# Altium PCB Main.PcbDoc
Units mm, origin at the board's own origin, x right, y up, seen from the top; angles counter-clockwise.
Board outline 54.5 x 67 mm, 4 copper layers (Top Layer, Ground Layer, Power Layer, Bottom Layer), stack 1.591 mm thick; 35 components, 40 nets, 143 pads, 40 vias.
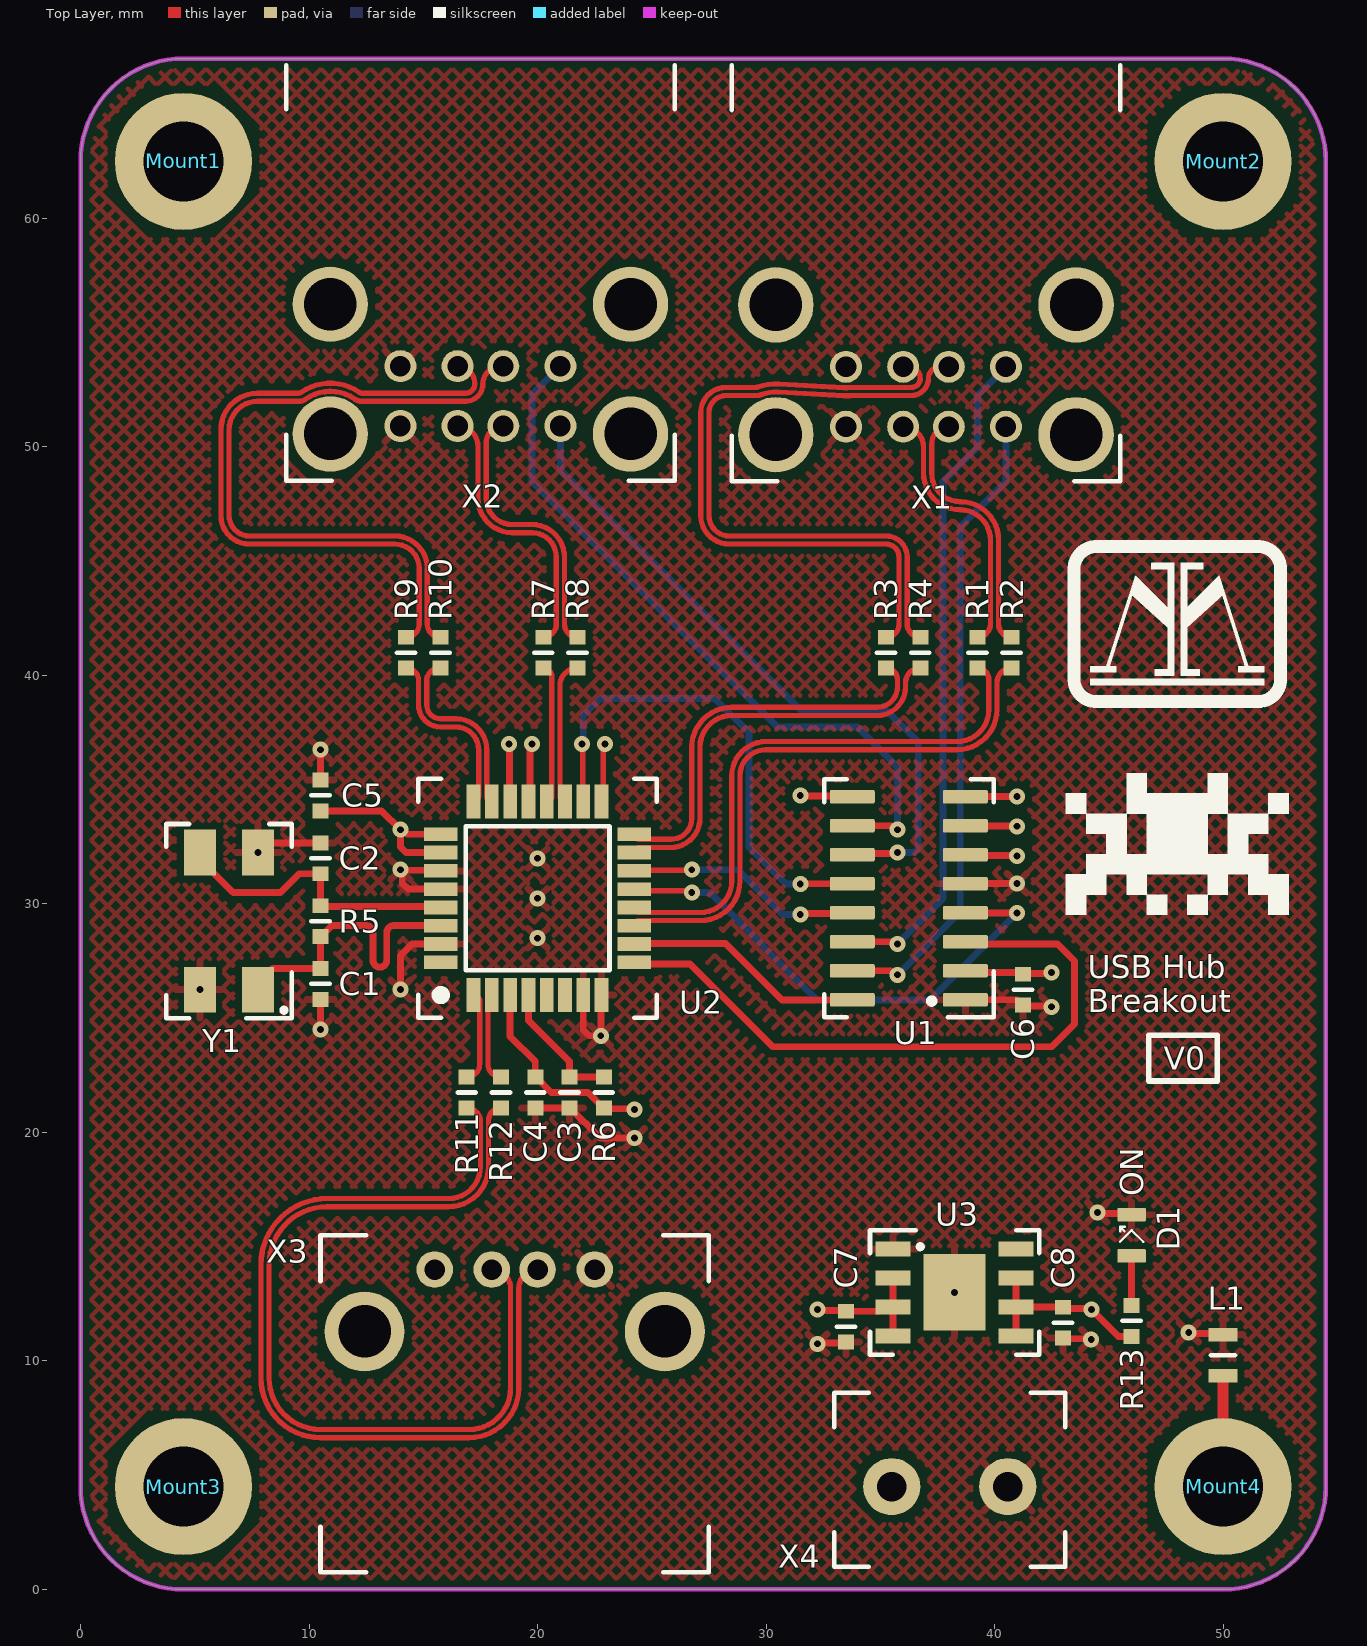
[diagram p0: Top Layer view]
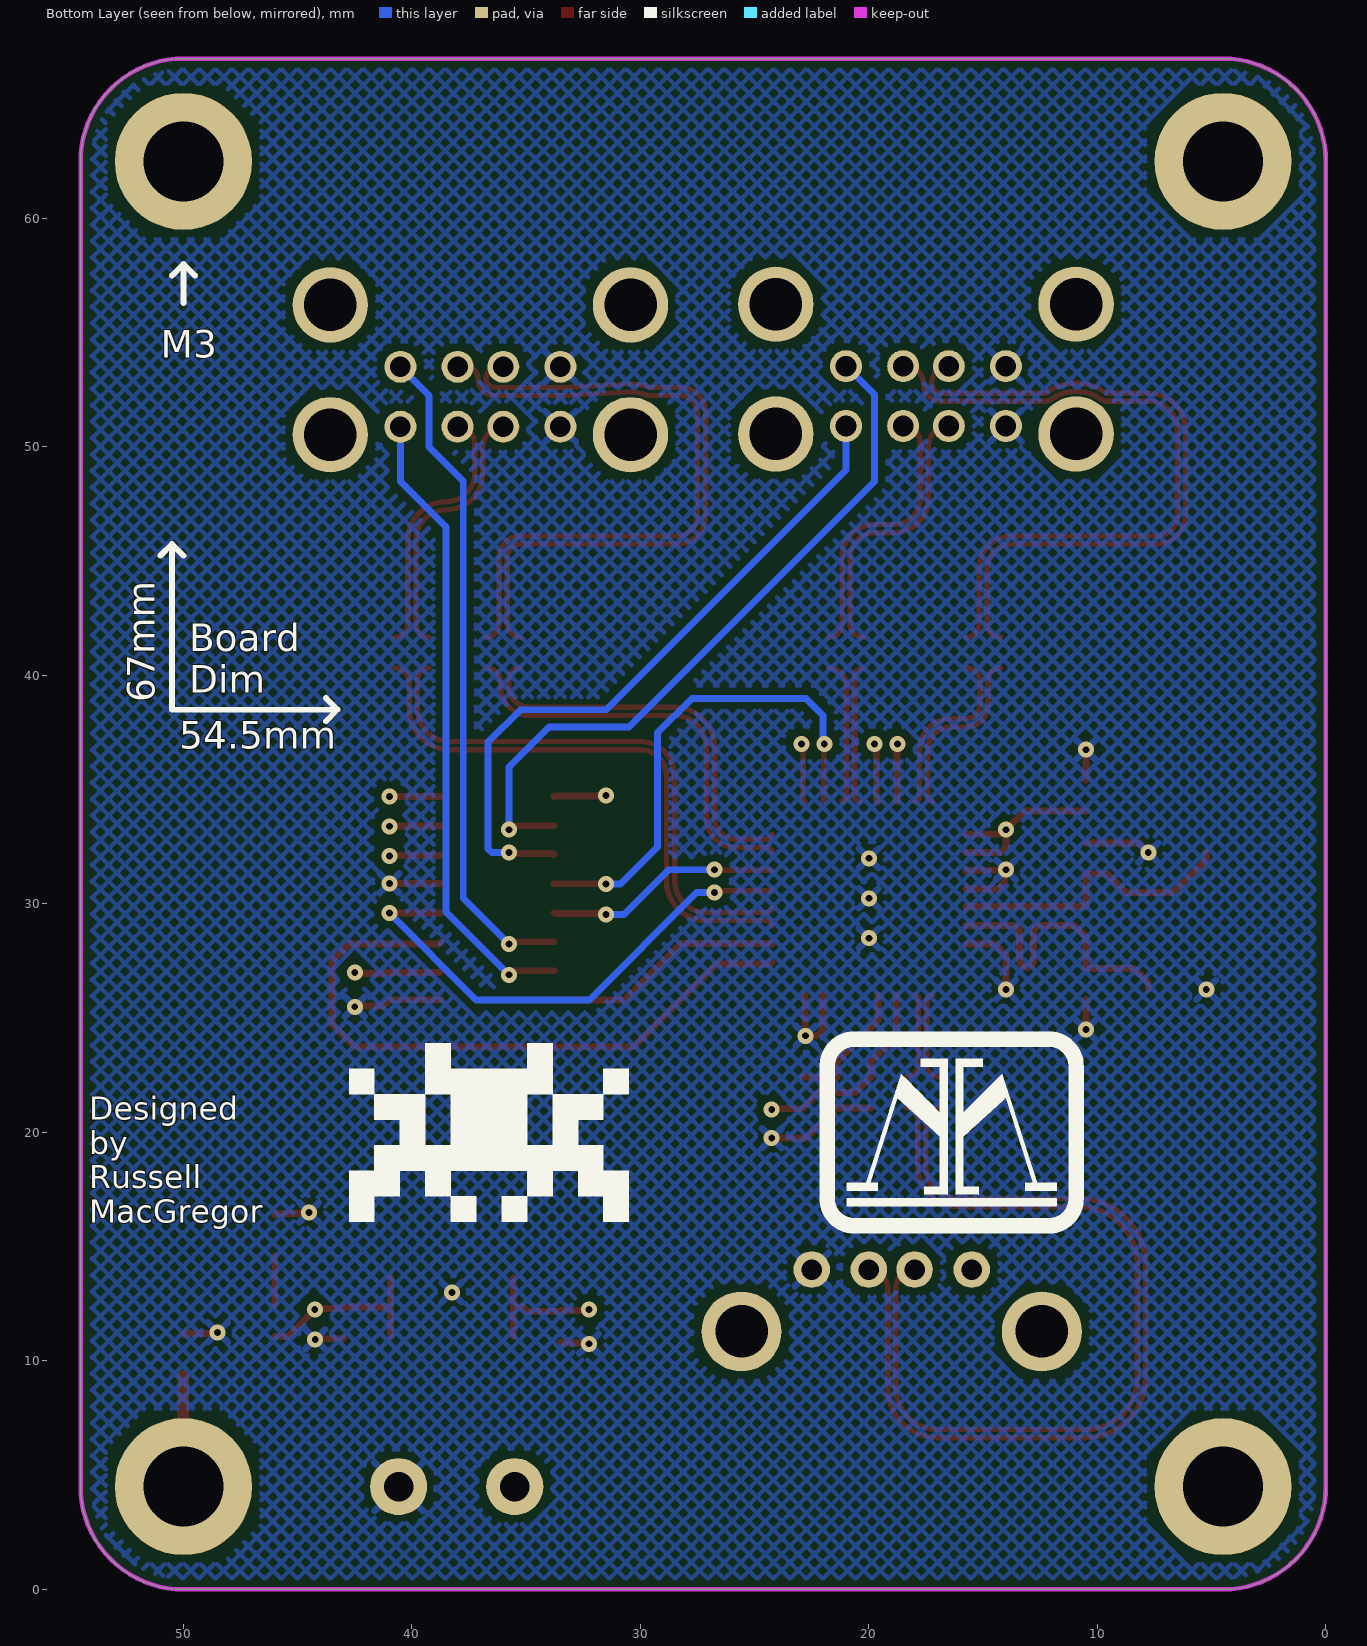
[diagram p1: Bottom Layer view, seen from below]
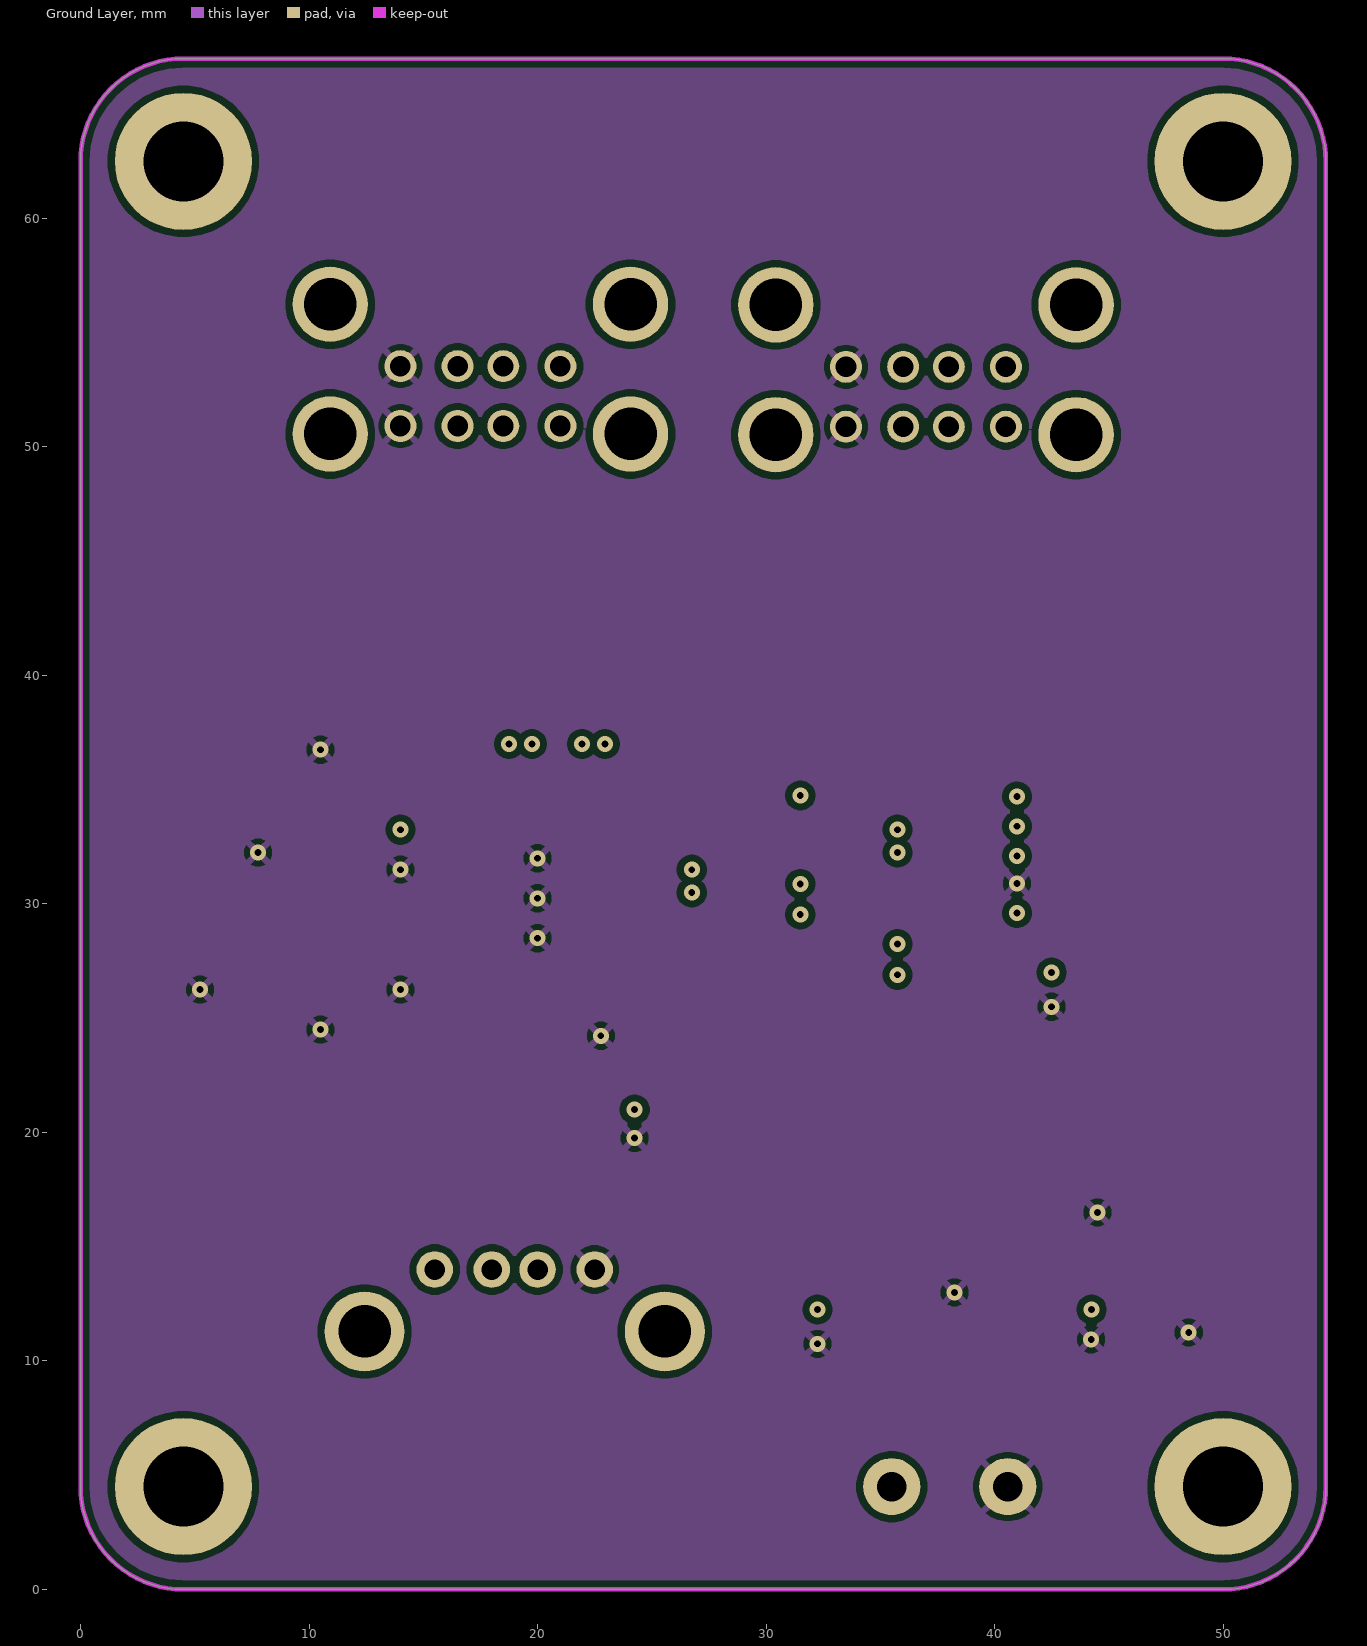
[diagram p2: Ground Layer]
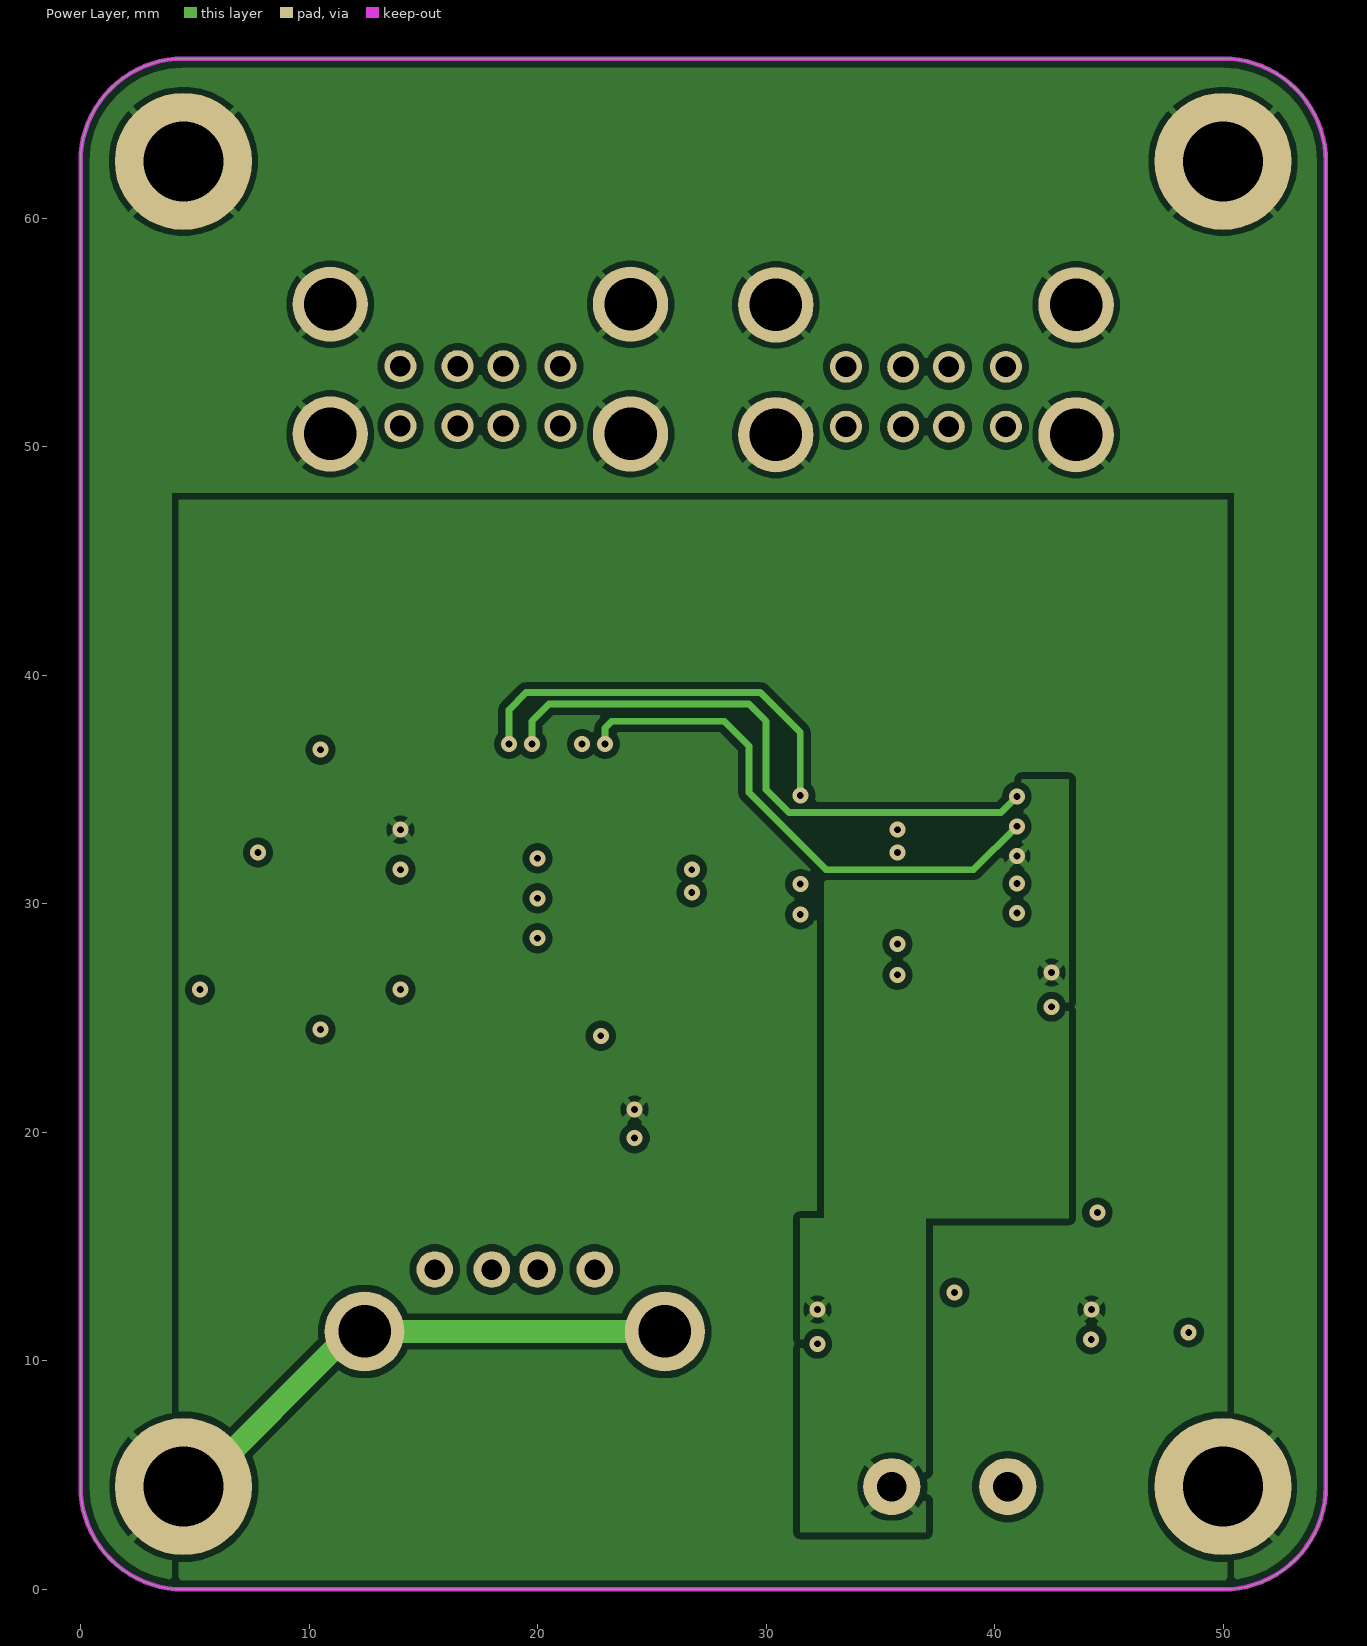
[diagram p3: Power Layer]
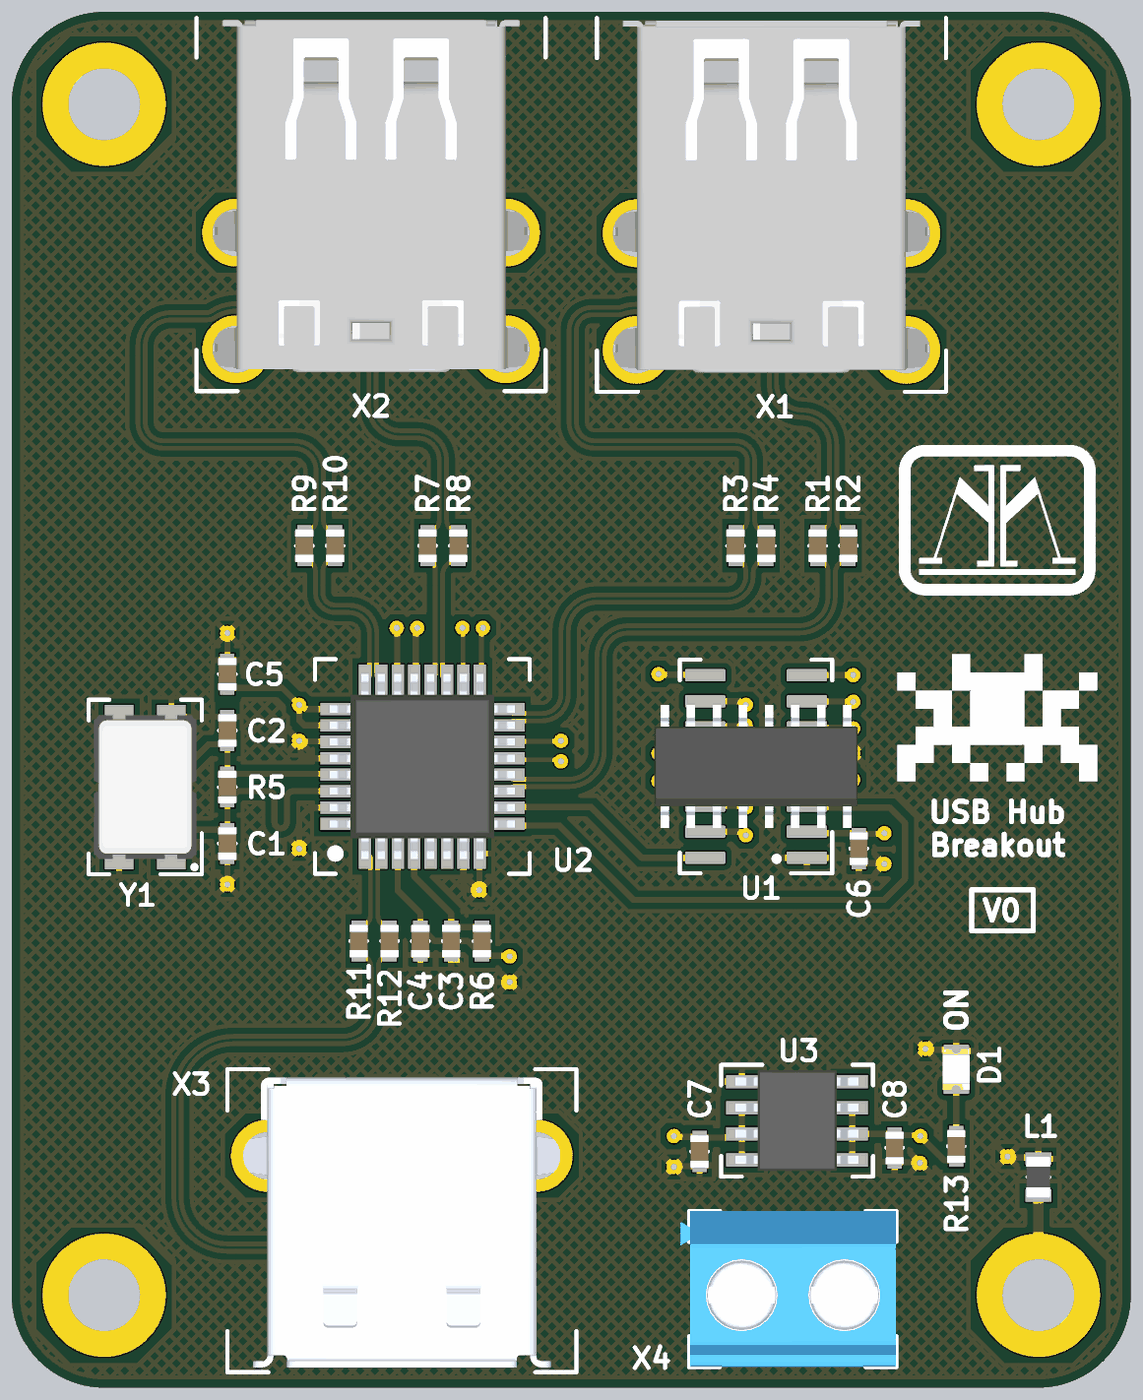
[diagram p4: 3D render of the assembled board from above, using the file's embedded part models]

## Layer stack, top to bottom
Top Solder: solder mask 0.0102, Solder Resist, Dk 3.8
Top Layer: signal copper 0.035
Dielectric 2: prepreg 0.2104, 7628*1, Dk 4.4
Ground Layer: signal copper 0.0175
Dielectric 1: dielectric 1.065, FR-4, Dk 4.8
Power Layer: signal copper 0.0175
Dielectric 3: prepreg 0.2104, 7628*1, Dk 4.4
Bottom Layer: signal copper 0.035
Bottom Solder: solder mask 0.0102, Solder Resist, Dk 3.8

## Board outline
4.5,0 cw(c4.5,4.5) 0,4.5 0,62.5 cw(c4.5,62.5) 4.5,67 50,67 cw(c50,62.5) 54.5,62.5 54.5,4.5 cw(c50,4.5) 50,0

## Design rules (kind name [scope] priority, off if disabled: settings)
BoardOutlineClearance [All] p1: gap=0.2 ignorepadtopadclearanceinfootprint=FALSE
Clearance "inPolygon Clearance" [InPolygon] p1: gap=0.3 ignorepadtopadclearanceinfootprint=TRUE // this rule ensures that every net within a polygon of a different net has a set clearance from the poly
Clearance "Different Diff Pair" [All] p2: gap=0.2 ignorepadtopadclearanceinfootprint=TRUE
Clearance "Same Diff Pair" [All] p3: gap=0.1 ignorepadtopadclearanceinfootprint=TRUE
Clearance "Different Nets" [not InAnyDifferentialPair] p4: gap=0.3 ignorepadtopadclearanceinfootprint=TRUE except(0.1: Arc-SMDPad Arc-THPad Arc-Via Arc-Text Track-SMDPad Track-THPad Track-Via Track-Text SMDPad-Text THPad-Text Via-Text Fill-Text Poly-Text Region-Text Text-Text; 0.12: Arc-Arc Arc-Track Track-Track; 0.15: SMDPad-SMDPad SMDPad-THPad SMDPad-Via THPad-THPad THPad-Via Via-Via; 0.2: Arc-Hole Track-Hole SMDPad-Hole THPad-Hole Via-Hole Fill-Hole Poly-Hole Region-Hole Text-Hole)
Clearance "Same Net" [not InAnyDifferentialPair] p5: gap=0 ignorepadtopadclearanceinfootprint=TRUE except(0.1: THPad-Via; 0.18: Arc-Arc Arc-Track Track-Track)
ComponentClearance [All] p1: gap=0.102 collisioncheckmode=3 verticalgap=0.102 showdistances=TRUE
DiffPairsRouting "Ethernet Routing" [InDifferentialPairClass('Ethernet_Pairs')] p1: maxlimit=0.25 minlimit=0.2 mostfreqgap=0.25 toplayer_maxgap=0.2 toplayer_prefgap=0.2 toplayer_minwidth=0.25 toplayer_maxwidth=0.25 toplayer_prefwidth=0.25 midlayer1_mingap=0.25 midlayer1_minwidth=0.19 midlayer1_maxwidth=0.19 midlayer1_prefwidth=0.19 midlayer2_mingap=0.25 midlayer2_minwidth=0.19 midlayer2_maxwidth=0.19 midlayer2_prefwidth=0.19 bottomlayer_maxgap=0.2 bottomlayer_prefgap=0.2 bottomlayer_minwidth=0.25 bottomlayer_maxwidth=0.25 bottomlayer_prefwidth=0.25 impedanceprofiledriven=TRUE maxuncoupledlength=12.7
DiffPairsRouting "USB Routing" [InDifferentialPairClass('USB_Pairs')] p2: maxlimit=0.291 minlimit=0.127 mostfreqgap=0.291 toplayer_maxgap=0.127 toplayer_prefgap=0.127 toplayer_minwidth=0.23 toplayer_maxwidth=0.23 toplayer_prefwidth=0.23 midlayer1_mingap=0.291 midlayer1_minwidth=0.25 midlayer1_maxwidth=0.25 midlayer1_prefwidth=0.25 midlayer2_mingap=0.291 midlayer2_minwidth=0.25 midlayer2_maxwidth=0.25 midlayer2_prefwidth=0.25 bottomlayer_maxgap=0.127 bottomlayer_prefgap=0.127 bottomlayer_minwidth=0.23 bottomlayer_maxwidth=0.23 bottomlayer_prefwidth=0.23 impedanceprofiledriven=TRUE impedanceprofileid={22B42C18-8A70-498F-AC70-E7D5BCB9B566} impedanceprofilevalue=90.000000 maxuncoupledlength=12.7
DiffPairsRouting "CAN Routing" [InDifferentialPairClass('CAN_Pairs')] p3: maxlimit=0.907 minlimit=0.5 mostfreqgap=0.907 toplayer_maxgap=0.5 toplayer_prefgap=0.5 toplayer_minwidth=0.201 toplayer_maxwidth=0.201 toplayer_prefwidth=0.201 midlayer1_mingap=0.907 midlayer1_minwidth=0.155 midlayer1_maxwidth=0.155 midlayer1_prefwidth=0.155 midlayer2_mingap=0.907 midlayer2_minwidth=0.155 midlayer2_maxwidth=0.155 midlayer2_prefwidth=0.155 bottomlayer_maxgap=0.5 bottomlayer_prefgap=0.5 bottomlayer_minwidth=0.201 bottomlayer_maxwidth=0.201 bottomlayer_prefwidth=0.201 maxuncoupledlength=12.7
Height [All] p1: minheight=0 maxheight=1816.048 prefheight=12.7
HoleSize [All] p1: absolutevalues=TRUE maxlimit=6.3 minlimit=0.3 maxpercent=80.000 minpercent=20.000
HoleToHoleClearance [All] p1: gap=0.25 allowstackedmicrovias=FALSE
Length [All] p1: maxlimit=43.432 minlimit=0 usedelayunits=TRUE mindelay=0.000000 maxdelay=10000.000000
MatchedLengths "Diff Pair Matched Delays" [InDifferentialPairClass('Ethernet_Pairs') or InDifferentialPairClass('USB_Pairs') or InDifferentialPairClass('CAN_Pairs')] p1: tolerance=5 checknetsindiffpair=TRUE checkdiffpairvsdiffpair=FALSE checkxsignals=FALSE checkothers=FALSE usedelayunits=TRUE delaytolerance=100.000000
MinimumAnnularRing [All] p1: minimumring=0.2
MinimumSolderMaskSliver [All] p1: minsoldermaskwidth=0
PlaneClearance "Supply Net Clearance" [InNetClass('Supply_Nets')] p1: clearance=0.5
PlaneClearance "All Nets" [All] p2: clearance=0.3
PolygonConnect "Supply Nets" [InNetClass('Supply_Nets')] p1: connectstyle=Relief reliefconductorwidth=0.3 reliefentries=4 polygonreliefangle="90 Angle" conductorbypadedge=TRUE mindistance=0.381 enablemindistance=FALSE airgapwidth=0.254
PolygonConnect General [All] p2: connectstyle=Relief reliefconductorwidth=0.254 reliefentries=4 polygonreliefangle="90 Angle" airgapwidth=0.254
RoutingVias [All] p1: holewidth=0.2 width=0.35 viastyle="Through Hole" minholewidth=0.15 minwidth=0.3 maxholewidth=6.3 maxwidth=6.55
SilkToSilkClearance [All] p1: silktosilkclearance=0
SilkToSolderMaskClearance [All] p1: minsilkscreentomaskgap=0 clearancetoexposedcopper=TRUE
SolderMaskExpansion [All] p1: expansion=0.075 istentingtop=FALSE
SupplyNets "Schematic Supply Nets_3" [InNet('GND')] p1: voltage=0.000
SupplyNets "Schematic Supply Nets_2" [InNet('+5V')] p2: voltage=0.000
SupplyNets "Schematic Supply Nets_7" [InNet('+3V3')] p3: voltage=0.000
SupplyNets "Schematic Supply Nets_1" [InNet('Earth')] p4: voltage=0.000
UnRoutedNet [All] p1: checkbadconnections=TRUE
Width "nRF Width" [InNetClass('nRF Signal')] p1: maxlimit=0.379 minlimit=0.263 preferedwidth=0.379 toplayer_minwidth=0.379 midlayer1_maxwidth=0.263 midlayer1_prefwidth=0.263 midlayer2_maxwidth=0.263 midlayer2_prefwidth=0.263 bottomlayer_minwidth=0.379 impedanceprofiledriven=TRUE minimp=50.000000 maximp=50.000000 favimp=50.000000 checkconnectedcopper=TRUE
Width [All] p2: maxlimit=100 minlimit=0.1 preferedwidth=0.3
20 further rules are at their usual default settings.

## Classes and differential pairs
differential pair class USB_Pairs: USB0_D USB0_DX USB1_D USB1_DX USB2_D USB2_DX USB3_D USB3_DX USB4_D USB4_DX
net class Supply_Nets: +3V3 +5V Earth GND
component class "USB Hub": C1 C2 C3 C4 C5 C6 R1 R2 R3 R4 R5 R6 R7 R8 R9 R10 R11 R12 U1 U2 X1 X2 X3 Y1
component class Regulator: C7 C8 D1 L1 Mount1 Mount2 Mount3 Mount4 R13 U3 X4
differential pair USB4_DX: +USB4_DX_P -USB4_DX_N
differential pair USB4_D: +USB4_D_P -USB4_D_N
differential pair USB3_DX: +USB3_DX_P -USB3_DX_N
differential pair USB3_D: +USB3_D_P -USB3_D_N
differential pair USB2_DX: +USB2_DX_P -USB2_DX_N
differential pair USB2_D: +USB2_D_P -USB2_D_N
differential pair USB1_DX: +USB1_DX_P -USB1_DX_N
differential pair USB1_D: +USB1_D_P -USB1_D_N
differential pair USB0_DX: +USB0_DX_P -USB0_DX_N
differential pair USB0_D: +USB0_D_P -USB0_D_N

## Components (designator, comment, footprint, x,y, rotation, side; value= is the part's Value field where it differs from the comment)
C1 "[Cap] 0603 24pF 1% 100V" "[Cap] SMD 0603" 10.5,26.5 r270 top
C2 "[Cap] 0603 24pF 1% 100V" "[Cap] SMD 0603" 10.5,32 r90 top
C3 "[Cap] 0603 0.1uF 10% 16V" "[Cap] SMD 0603" 21.4,21.75 r90 top
C4 "[Cap] 0603 0.1uF 10% 16V" "[Cap] SMD 0603" 19.9,21.75 r90 top
C5 "[Cap] 0603 0.1uF 10% 16V" "[Cap] SMD 0603" 10.5,34.75 r270 top
C6 "[Cap] 0603 0.1uF 10% 16V" "[Cap] SMD 0603" 41.25,26.25 r90 top
C7 "[Cap] 0603 10uF 10% 10V" "[Cap] SMD 0603" 33.5,11.5 r90 top
C8 "[Cap] 0603 10uF 10% 10V" "[Cap] SMD 0603" 43,11.675 r90 top
D1 "[LED] SMD 0805 Green" "[LED] SMD 0805" 46,15.5 r90 top
L1 "652-MH2029-300Y" "[Ferrite] SMD 0805" 50,10.25 r90 top
Mount1 "M3 Mount Hole" "[Mount] M3 Mount Hole" 4.5,62.5 r0 top
Mount2 "M3 Mount Hole" "[Mount] M3 Mount Hole" 50,62.5 r0 top
Mount3 "M3 Mount Hole" "[Mount] M3 Mount Hole" 4.5,4.5 r0 top
Mount4 "M3 Mount Hole" "[Mount] M3 Mount Hole" 50,4.5 r0 top
R1 "[27] SMD 0603 1% 1/10W" "[Res] SMD 0603" 39.25,41 r270 top
R2 "[27] SMD 0603 1% 1/10W" "[Res] SMD 0603" 40.75,41 r270 top
R3 "[27] SMD 0603 1% 1/10W" "[Res] SMD 0603" 35.25,41 r270 top
R4 "[27] SMD 0603 1% 1/10W" "[Res] SMD 0603" 36.75,41 r270 top
R5 "[1M] SMD 0603 1% 1/10W" "[Res] SMD 0603" 10.5,29.25 r270 top
R6 "[47k] SMD 0603 1% 1/10W" "[Res] SMD 0603" 22.9,21.75 r90 top
R7 "[27] SMD 0603 1% 1/10W" "[Res] SMD 0603" 20.25,41 r270 top
R8 "[27] SMD 0603 1% 1/10W" "[Res] SMD 0603" 21.75,41 r270 top
R9 "[27] SMD 0603 1% 1/10W" "[Res] SMD 0603" 14.25,41 r270 top
R10 "[27] SMD 0603 1% 1/10W" "[Res] SMD 0603" 15.75,41 r270 top
R11 "[27] SMD 0603 1% 1/10W" "[Res] SMD 0603" 16.9,21.75 r90 top
R12 "[27] SMD 0603 1% 1/10W" "[Res] SMD 0603" 18.4,21.75 r90 top
R13 "[220] SMD 0603 1% 1/10W" "[Res] SMD 0603" 46,11.75 r90 top
U1 "[USB Power] 500mA 4port" "[IC] USB Hub Power Distribution" 36.25,30.25 r180 top
U2 "4port" "[USB Hub] USB2.0 4port" 20,30.25 r90 top
U3 "3V3 1.5A" "[Linear] 3V3 1.5A" 38.25,13 r0 top
X1 "USB-A" "[USB] Type-A Dual" 37,66.5 r180 top
X2 "USB-A" "[USB] Type-A Dual" 17.5,66.53 r180 top
X3 "USB-A" "[USB] Type-A" 19,14 r0 top
X4 "2pin Screw Terminal" "[Screw Terminal] 2pin 5mm" 38,4.5 r0 top
Y1 "[Crystal] SMD 6MHz" "[Crystal] SMD 6MHz" 6.5,29.25 r270 top

## Footprints (in the part's own frame and the unit in brackets; to place one, negate y for a bottom-side part, rotate by r counter-clockwise, add the part's x,y. Pads: shape width x height; smd on the part's side, far side on the other; paste and mask are expansions set on the pad)
"[Cap] SMD 0603" [mm]
  rect 0.65x0.7 smd: 1(-0.675,0) 2(0.675,0)
  silkscreen extent 0,-0.4 0,0.4, body extent -0.8,-0.45 0.8,0.45, height 0.8
"[Crystal] SMD 6MHz" [mm] "ECS-060-18-20BM-JEN-TR"
  rect 2x1.4 smd: 1(3,1.27) 2(-3,1.27) 3(-3,-1.27) 4(3,-1.27)
  silkscreen extent -4.25,-2.75 4.25,2.75, body extent -3.5,-2.5 3.5,2.5, height 1.3
"[Ferrite] SMD 0805" [mm]
  rect 0.6x1.25 smd: 1(-0.9,0) 2(0.9,0)
  silkscreen extent 0,-0.53 0,0.53, body extent -1,-0.6 1,0.6, height 1.1
"[IC] USB Hub Power Distribution" [mm]
  rrect25% 1.97x0.6 smd: 1(-2.475,4.445) 2(-2.475,3.175) 3(-2.475,1.905) 4(-2.475,0.635) 5(-2.475,-0.635) 6(-2.475,-1.905) 7(-2.475,-3.175) 8(-2.475,-4.445) 9(2.475,-4.445) 10(2.475,-3.175) 11(2.475,-1.905) 12(2.475,-0.635) 13(2.475,0.635) 14(2.475,1.905) 15(2.475,3.175) 16(2.475,4.445)
  silkscreen extent -3.71,-5.2 3.71,5.2, body extent -3,-4.95 3,4.95, height 1.75
"[LED] SMD 0805" [mm]
  rrect20% 0.6x1.25 smd: 1(-0.9,0) 2(0.9,0)
  silkscreen extent -0.28,-0.51 0.37,0.51, body extent -1,-0.65 1,0.65, height 0.8
"[Linear] 3V3 1.5A" [mm]
  rect 1.525x0.65 smd: 1(-2.688,1.905) 2(-2.688,0.635) 3(-2.688,-0.635) 4(-2.688,-1.905) 5(2.688,-1.905) 6(2.688,-0.635) 7(2.688,0.635) 8(2.688,1.905)
  rect 2.71x3.35 smd: 9(0,0)
  silkscreen extent -3.7,-2.73 3.7,2.73, body extent -3,-2.45 3,2.45, height 1.5
"[Mount] M3 Mount Hole" [mm] "Place at least 4.5mm from board edge. Plated."
  round 6 hole 3.5: 1(0,0)
"[Res] SMD 0603" [mm]
  rect 0.65x0.7 smd: 1(-0.675,0) 2(0.675,0)
  silkscreen extent 0,-0.4 0,0.4, body extent -0.8,-0.45 0.8,0.45, height 0.8
"[Screw Terminal] 2pin 5mm" [mm]
  round 2.5 hole 1.3: 1(-2.5,0) 2(2.58,0)
  silkscreen extent -5.01,-3.5 5.09,4.1, body extent -5.45,-3.5 5.05,4.1, height 9.99
"[USB Hub] USB2.0 4port" [mm]
  rect 1.475x0.6 smd: 1(-4.238,2.8) 2(-4.238,2) 3(-4.238,1.2) 4(-4.238,0.4) 5(-4.238,-0.4) 6(-4.238,-1.2) 7(-4.238,-2) 8(-4.238,-2.8) 17(4.238,-2.8) 18(4.238,-2) 19(4.238,-1.2) 20(4.238,-0.4) 21(4.238,0.4) 22(4.238,1.2) 23(4.238,2) 24(4.238,2.8)
  rect 0.6x1.475 smd: 9(-2.8,-4.238) 10(-2,-4.238) 11(-1.2,-4.238) 12(-0.4,-4.238) 13(0.4,-4.238) 14(1.2,-4.238) 15(2,-4.238) 16(2.8,-4.238) 25(2.8,4.238) 26(2,4.238) 27(1.2,4.238) 28(0.4,4.238) 29(-0.4,4.238) 30(-1.2,4.238) 31(-2,4.238) 32(-2.8,4.238)
  silkscreen extent -5.22,-5.22 5.23,5.23, body extent -4.5,-4.5 4.5,4.5, height 1.6
"[USB] Type-A" [mm]
  round 1.6 hole 0.9: 1(-3.5,0) 2(-1,0) 3(1,0) 4(3.5,0)
  round 3.5 hole 2.3: MH(-6.57,-2.71) MH(6.57,-2.71)
  silkscreen extent -8.5,-13.25 8.5,1.5, body extent -7.9,-13.01 7.9,1.09, height 7.6
"[USB] Type-A Dual" [mm] "61400826021"
  round 1.4 hole 0.9: 1(-3.5,15.61) 2(-1,15.61) 3(1,15.61) 4(3.5,15.61) 5(-3.5,12.99) 6(-1,12.99) 7(1,12.99) 8(3.5,12.99)
  round 3.3 hole 2.3: MH(-6.57,10.28) MH(-6.57,15.96) MH(6.57,10.28) MH(6.57,15.96)
  silkscreen extent -8.5,-0.2 8.5,18, body extent -7.91,-0.08 7.91,17.07, height 16.19

## Part data
C1 C2: "CC0603JRNPO9BN240", Capacitance=24pF, Max Voltage=50V, Size Package=0603, Supplier Part Number 1=311-1772-1-ND, Tolerance=5%, Supplier 1=DigiKey
C3 C4 C5 C6: "CC0603KRX7R7BB104", Capacitance=100nF, Max Voltage=16V, Size Package=0603, Supplier Part Number 1=311-1088-6-ND, Tolerance=10%, Supplier 1=DigiKey
C7 C8: "CL10A106KP8NNNC", Capacitance=10uF, Max Voltage=10V, Size Package=0603, Supplier Part Number 1=1276-1192-6-ND, Tolerance=10%, Supplier 1=DigiKey
D1: "LG R971-KN-1-0-20-R18", Color=Green, Size Package=0805, Supplier Part Number 1=475-LGR971-KN-1CT-ND, Supplier 1=DigiKey
L1: library part "[Ferrite] SMD 0805 3A 30ohm", Res @ Freq="30 @ 100MHz", Size Package=0805, Supplier Part Number 1=MH2029-300YCT-ND, Supplier 1=DigiKey
Mount1 Mount2 Mount3 Mount4: library part "[Mount] M3 Mount Hole", "Place at least 4.5mm from board edge. Plated."
R1 R2 R3 R4 R7 R8 R9 R10 R11 R12: "MCT06030C2709FP500", Resistance=27, Size Package=0603, Supplier Part Number 1=749-1631-1-ND, Tolerance=1%, Supplier 1=DigiKey, Wattage=1/10W
R5: "RC0603FR-071ML", Resistance=1M, Size Package=0603, Supplier Part Number 1=311-1.00MHRDKR-ND, Tolerance=1%, Supplier 1=DigiKey, Wattage=1/10W
R6: "RC0603FR-0747KL", Resistance=47k, Size Package=0603, Supplier Part Number 1=311-47.0KHRDKR-ND, Tolerance=1%, Supplier 1=DigiKey, Wattage=1/10W
R13: "CRGCQ0805F220R", Resistance=220, Size Package=0603, Supplier Part Number 1=A129741CT-ND, Tolerance=1%, Supplier 1=DigiKey, Wattage=1/8W
U1: "TPS2044BDR", Supplier Part Number 1=296-26909-6-ND, Supplier 1=DigiKey
U2: library part "[USB Hub] USB 2.0 4port", "TUSB2046BVFR", Supplier Part Number 1=296-27131-1-ND, Supplier 1=DigiKey
U3: library part "[Linear] 3V3 1.5A", "AP7362A-33SP-13", Supplier Part Number 1=AP7362A-33SP-13DICT-ND, Supplier 1=DigiKey
X1 X2: library part "[USB] Type-A Dual", "61400826021", Supplier Part Number 1=732-2107-ND, Supplier 1=DigiKey
X3: library part "[USB] Type-A", "KUSBEX-ASFS1N-B", Supplier Part Number 1=2092-KUSBEX-ASFS1N-B-ND, Supplier 1=DigiKey
X4: library part "[Screw Terminal] 2pin", "TB002-500-02BE", Supplier Part Number 1=102-6145-ND, Supplier 1=DigiKey
Y1: "ECS-060-18-20BM-JEN-TR", Supplier Part Number 1=XC2349DKR-ND, Supplier 1=DigiKey

## Via types
v1: diameter 0.7, hole 0.3, Top Layer to Bottom Layer, 40 vias

## Nets (pads, with @x,y where several pads share a name; then routed paths per layer and width w, separated by ;. In a path a pad name is that pad's centre, name@x,y a point inside that pad or via, vN(x,y) a via of type N, cw(c..) or ccw(c..) an arc to the next point about the centre after c; other vN are vias at no path point)
+3V3: C4.2 C5.2 C8.2 R6.1 R13.1 U2.3 U2.25 U2.26 U3.5 U3.6 U3.7 | length 25.4
  Top Layer w0.3: C5.2 13.175,34.075 v1(14,33.25) ; U2.26 14.25,32.25 14,32.5 v1(14,33.25) ; U2.25 14.308,33.05 14.108,33.25 v1(14,33.25) ; U2.3 18.8,24.2 19.9,23.1 C4.2 19.925,22.425 20.6,21.75 22.2,21.75 22.912,21.038 24.212,21.038 v1(24.25,21) ; U3.5 U3.6 ; U3.7 U3.6 ; R13.1 45.425,11.075 v1(44.25,12.25) 44.2,12.3 43.05,12.3 C8.2 42.992,12.358 40.945,12.358 U3.6
+5V: C6.2 C7.2 U1.2 U1.6 U3.2 U3.3 U3.4 X4.1 | length 12.1
  Top Layer w0.3: v1(32.25,12.25) 32.287,12.213 33.462,12.213 C7.2 34.934,12.175 35.124,12.365 U3.3 ; U3.4 U3.3 ; U3.2 U3.3 ; U1.2 38.8,27 41.175,27 C6.2 41.287,26.963 42.463,26.963 v1(42.5,27) ; U1.6 38.752,32.127 40.954,32.127 v1(40.981,32.1)
\USB1_EN: U1.3 U2.9 | length 29.1
  Top Layer w0.3: U2.9 24.313,27.375 26.675,27.375 30.3,23.75 42.5,23.75 43.5,24.75 43.5,27.5 42.75,28.25 38.82,28.25 U1.3
\USB1_OC: U1.16 U2.10 | length 10.6
  Top Layer w0.3: U2.10 24.263,28.275 28.225,28.275 30.698,25.802 33.772,25.802 U1.16
\USB2_EN: U1.4 U2.13 | length 22.6
  Top Layer w0.23: U2.13 24.313,30.575 26.675,30.575 v1(26.75,30.5)
  Top Layer w0.3: U1.4 38.732,29.607 40.974,29.607 v1(40.981,29.6)
  Bottom Layer w0.3: v1(26.75,30.5) 27.537,30.5 32.235,25.802 37.184,25.802 v1(40.981,29.6)
\USB2_OC: U1.13 U2.14 | length 10.4
  Top Layer w0.23: U2.14 24.263,31.475 26.725,31.475 v1(26.75,31.5)
  Top Layer w0.3: v1(31.5,29.54) 31.537,29.577 33.737,29.577 U1.13
  Bottom Layer w0.3: v1(26.75,31.5) 28.75,31.5 30.71,29.54 v1(31.5,29.54)
\USB3_EN: U1.7 U2.17 | length 28.4
  Top Layer w0.23: U2.17 22.875,34.563 22.875,36.925 v1(22.95,37)
  Top Layer w0.3: U1.7 38.737,33.412 40.969,33.412 v1(40.981,33.4)
  Power Layer w0.3: v1(22.95,37) 22.95,37.7 23.25,38 28.156,38 29.25,36.906 29.25,34.875 32.625,31.5 39.081,31.5 v1(40.981,33.4)
\USB3_OC: U1.12 U2.18 | length 22.2
  Top Layer w0.23: v1(21.95,37) 21.975,36.975 21.975,34.513 U2.18
  Top Layer w0.3: v1(31.5,30.88) 31.502,30.882 33.772,30.882 U1.12
  Bottom Layer w0.3: v1(21.95,37) 22,37.05 22,38.25 22.75,39 27.75,39 29.25,37.5 29.25,32.5 30.87,30.88 v1(31.5,30.88)
\USB4_EN: U1.8 U2.21 | length 31.4
  Top Layer w0.3: U2.21 19.673,34.561 19.673,36.914 v1@19.746,36.987 ; U1.8 38.727,34.697 40.979,34.697 v1(40.981,34.7)
  Power Layer w0.3: v1(19.75,37) 19.75,38 20.5,38.75 29.25,38.75 30,38 30,35 31,34 40.281,34 v1(40.981,34.7)
\USB4_OC: U1.9 U2.22 | length 22.9
  Top Layer w0.3: v1(18.75,37) 18.775,36.975 18.775,34.513 U2.22 ; v1(31.5,34.75) 31.528,34.722 33.747,34.722 U1.9
  Power Layer w0.3: v1(18.75,37) 18.75,38.5 19.5,39.25 29.75,39.25 31.5,37.5 v1(31.5,34.75)
Earth: L1.1 Mount1.1 Mount2.1 Mount3.1 Mount4.1 X1.MH X2.MH X3.MH | length 28.7
  Top Layer w0.5: Mount4.1 L1.1
  Power Layer w1: Mount3.1 5.07,4.5 11.86,11.29 12.43,11.29 X3.MH@25.57,11.29
GND: C1.2 C2.2 C3.1 C4.1 C5.1 C6.1 C7.1 C8.1 D1.2 L1.2 U1.1 U1.5 U2.7 U2.8 U2.27 U2.28 U2.31 U3.1 U3.9 X1.4 X1.8 X2.4 X2.8 X3.4 X4.2 Y1.2 Y1.4 | length 34.1
  Top Layer w0.3: v1(7.77,32.25) 8.195,32.675 C2.2 ; v1(10.5,24.5) C1.2 ; C5.1 v1(10.5,36.75) ; v1(14,26.25) 14,27.75 14.5,28.25 U2.31 ; U2.28 14.35,30.65 14.077,30.923 14.077,31.423 v1(14,31.5) 14.025,31.475 15.737,31.475 U2.27 ; C4.1 C3.1 21.425,21.075 22.75,19.75 v1(24.25,19.75) ; U2.7 22,24.5 22.269,24.231 v1(22.769,24.231) 22.784,24.247 22.784,25.996 U2.8 ; v1(32.25,10.75) 32.287,10.787 33.462,10.787 C7.1 ; U1.1 40.995,25.805 41.225,25.575 C6.1 41.287,25.538 42.462,25.538 v1(42.5,25.5) ; U1.5 38.732,30.892 40.974,30.892 v1(40.981,30.9) ; C8.1 43.028,10.972 44.203,10.972 v1(44.231,10.944) ; v1(44.5,16.5) 44.55,16.45 45.95,16.45 D1.2 ; v1(48.5,11.25) 48.55,11.2 49.95,11.2 L1.2
  other v1: 38.25,13 5.23,26.25 20,28.5 20,30.25 20,32
NetD1_1: D1.1 R13.2 | length 2.2
  Top Layer w0.3: R13.2 D1.1
USB0_D_N: R12.1 X3.2 | length 38.4
  Top Layer w0.23: X3.2 cw(c18,13.179) 18.821,13.179 18.821,8.821 cw(c17,8.821) 17,7 10.5,7 cw(c10.5,9.25) 8.25,9.25 8.25,14.21 cw(c10.79,14.21) 10.79,16.75 16.107,16.75 ccw(c16.107,18.5) 17.857,18.5 17.857,20.532 cw(c18.4,20.532) R12.1
USB0_D_P: R11.1 X3.3 | length 39.6
  Top Layer w0.23: R11.1 cw(c16.9,20.475) 17.5,20.475 17.5,18.5 cw(c16.107,18.5) 16.107,17.107 10.79,17.107 ccw(c10.79,14.21) 7.893,14.21 7.893,9.25 ccw(c10.5,9.25) 10.5,6.643 17,6.643 ccw(c17,8.821) 19.179,8.821 19.179,13.179 cw(c20,13.179) X3.3
USB0_DX_N: R12.2 U2.2 | length 4
  Top Layer w0.23: U2.2 ccw(c18,25.841) 17.829,25.841 17.829,22.996 ccw(c18.4,22.996) R12.2
USB0_DX_P: R11.2 U2.1 | length 4.1
  Top Layer w0.23: R11.2 ccw(c16.9,22.996) 17.471,22.996 17.471,25.741 ccw(c17.2,25.741) U2.1
USB1_D_N: R2.1 X1.2 | length 11.6
  Top Layer w0.23: X1.2 ccw(c38,50.14) 37.25,50.14 37.25,48.857 ccw(c38.5,48.857) 38.5,47.607 cw(c38.5,45.929) 40.179,45.929 40.179,42.246 ccw(c40.75,42.246) R2.1
USB1_D_P: R1.1 X1.3 | length 11.7
  Top Layer w0.23: X1.3 cw(c36,49.997) 36.893,49.997 36.893,48.857 ccw(c38.5,48.857) 38.5,47.25 cw(c38.5,45.929) 39.821,45.929 39.821,42.246 cw(c39.25,42.246) R1.1
USB1_DX_N: R2.2 U2.11 | length 25.4
  Top Layer w0.23: U2.11 cw(c24.459,29.05) 24.459,29.272 27.129,29.272 ccw(c27.129,31) 28.857,31 28.857,35.607 cw(c30,35.607) 30,36.75 38.357,36.75 ccw(c38.357,38.5) 40.107,38.5 40.107,39.682 cw(c40.75,39.682) R2.2
USB1_DX_P: R1.2 U2.12 | length 24.8
  Top Layer w0.23: U2.12 ccw(c24.459,29.85) 24.459,29.629 27.129,29.629 ccw(c27.129,31) 28.5,31 28.5,35.607 cw(c30,35.607) 30,37.107 38.357,37.107 ccw(c38.357,38.5) 39.75,38.5 39.75,39.825 ccw(c39.25,39.825) R1.2
USB1_VOUT: U1.15 X1.1 | length 28
  Top Layer w0.3: U1.15 35.448,27.075 35.623,26.9 v1(35.75,26.9)
  Bottom Layer w0.3: v1(35.75,26.9) 38.5,29.65 38.5,46.5 40.5,48.5 X1.1
USB2_D_N: R4.1 X1.6 | length 29.7
  Top Layer w0.23: R4.1 cw(c36.75,42.246) 36.179,42.246 36.179,45.179 ccw(c35.25,45.179) 35.25,46.107 28.393,46.107 cw(c28.393,47) 27.5,47 27.5,51.5 cw(c28.25,51.5) 28.25,52.25 29.573,52.25 ccw(c29.571,52.837) 29.775,52.287 cw(c30.43,50.54) 30.535,52.402 33.429,52.24 ccw(c33.5,53.51) 33.663,52.248 cw(c33.692,52.02) 33.691,52.25 36.357,52.25 ccw(c36.357,53) 37.107,53 cw(c37.617,53) 37.617,53.51 X1.6
USB2_D_P: R3.1 X1.7 | length 29.6
  Top Layer w0.23: R3.1 ccw(c35.25,42.246) 35.821,42.246 35.821,45.179 ccw(c35.25,45.179) 35.25,45.75 28.393,45.75 cw(c28.393,47) 27.143,47 27.143,51.5 cw(c28.25,51.5) 28.25,52.607 29.572,52.607 ccw(c29.571,52.837) 29.651,52.621 cw(c30.43,50.54) 30.555,52.759 33.449,52.596 ccw(c33.5,53.51) 33.618,52.602 cw(c33.692,52.02) 33.69,52.607 36.357,52.607 ccw(c36.357,53) 36.75,53 ccw(c36.24,53) 36.24,53.51 X1.7
USB2_DX_N: R4.2 U2.15 | length 18.5
  Top Layer w0.23: U2.15 cw(c24.459,32.25) 24.459,32.472 25.829,32.472 ccw(c25.829,33.75) 27.107,33.75 27.107,36.857 cw(c28.5,36.857) 28.5,38.25 34.857,38.25 ccw(c34.857,39.5) 36.107,39.5 36.107,39.682 cw(c36.75,39.682) R4.2
USB2_DX_P: R3.2 U2.16 | length 17.9
  Top Layer w0.23: U2.16 ccw(c24.459,33.05) 24.459,32.829 25.829,32.829 ccw(c25.829,33.75) 26.75,33.75 26.75,36.857 cw(c28.5,36.857) 28.5,38.607 34.857,38.607 ccw(c34.857,39.5) 35.75,39.5 35.75,39.825 ccw(c35.25,39.825) R3.2
USB2_VOUT: U1.14 X1.5 | length 29.3
  Top Layer w0.3: U1.14 35.448,28.345 35.623,28.17 v1@35.75,28.17
  Bottom Layer w0.3: v1(35.75,28.25) 37.75,30.25 37.75,48.5 39.25,50 39.25,52.26 X1.5
USB3_D_N: R8.1 X2.2 | length 12.3
  Top Layer w0.23: X2.2 ccw(c18.5,50.17) 17.75,50.17 17.75,47.75 ccw(c18.893,47.75) 18.893,46.607 19.75,46.607 cw(c19.75,45.179) 21.179,45.179 21.179,42.246 ccw(c21.75,42.246) R8.1
USB3_D_P: R7.1 X2.3 | length 12.4
  Top Layer w0.23: X2.3 cw(c16.5,50.027) 17.393,50.027 17.393,47.75 ccw(c18.893,47.75) 18.893,46.25 19.75,46.25 cw(c19.75,45.179) 20.821,45.179 20.821,42.246 cw(c20.25,42.246) R7.1
USB3_DX_N: R8.2 U2.19 | length 6.4
  Top Layer w0.23: U2.19 cw(c21.2,34.71) 20.978,34.71 20.978,39.553 cw(c21.75,39.553) R8.2
USB3_DX_P: R7.2 U2.20 | length 6.2
  Top Layer w0.23: R7.2 cw(c20.25,39.954) 20.621,39.954 20.621,34.71 cw(c20.4,34.71) U2.20
USB3_VOUT: U1.11 X2.1 | length 30.2
  Top Layer w0.3: U1.11 33.822,32.202 35.702,32.202 v1(35.75,32.25)
  Bottom Layer w0.3: X2.1 21,49 31.5,38.5 35.25,38.5 36.665,37.085 36.665,32.415 36.5,32.25 v1(35.75,32.25)
USB4_D_N: R10.1 X2.6 | length 30.9
  Top Layer w0.23: R10.1 cw(c15.75,42.246) 15.179,42.246 15.179,44.679 ccw(c13.75,44.679) 13.75,46.107 7.393,46.107 cw(c7.393,47) 6.5,47 6.5,50.75 cw(c7.75,50.75) 7.75,52 9.537,52 ccw(c9.535,52.587) 9.869,52.104 cw(c10.93,50.57) 11.992,52.103 ccw(c12.325,52.587) 12.323,52 16.857,52 ccw(c16.857,52.75) 17.607,52.75 cw(c18.397,52.75) 18.397,53.54 X2.6
USB4_D_P: R9.1 X2.7 | length 30.7
  Top Layer w0.23: R9.1 ccw(c14.25,42.246) 14.821,42.246 14.821,44.679 ccw(c13.75,44.679) 13.75,45.75 7.393,45.75 cw(c7.393,47) 6.143,47 6.143,50.75 cw(c7.75,50.75) 7.75,52.357 9.536,52.357 ccw(c9.535,52.587) 9.666,52.398 cw(c10.93,50.57) 12.195,52.397 ccw(c12.325,52.587) 12.324,52.357 16.857,52.357 ccw(c16.857,52.75) 17.25,52.75 17.25,52.79 ccw(c16.5,52.79) X2.7
USB4_DX_N: R10.2 U2.23 | length 8.1
  Top Layer w0.23: R10.2 15.7,40.325 ccw(c15.7,39.775) 15.15,39.775 15.15,38.707 ccw(c15.75,38.707) 15.75,38.107 16.421,38.107 cw(c16.421,36.75) 17.778,36.75 17.778,34.71 ccw(c18,34.71) U2.23
USB4_DX_P: R9.2 U2.24 | length 8.1
  Top Layer w0.23: R9.2 cw(c14.25,39.782) 14.793,39.782 14.793,38.707 ccw(c15.75,38.707) 15.75,37.75 16.421,37.75 cw(c16.421,36.75) 17.421,36.75 17.421,34.71 cw(c17.2,34.71) U2.24
USB4_VOUT: U1.10 X2.5 | length 31.5
  Top Layer w0.3: U1.10@33.772,33.422 U1.10 35.448,33.425 35.623,33.25 v1(35.75,33.25)
  Bottom Layer w0.3: X2.5 19.75,52.29 19.75,48.5 30.5,37.75 34,37.75 35.75,36 v1(35.75,33.25)
"USB XTAL 1": C1.1 R5.2 U2.30 Y1.1 | length 13.2
  Top Layer w0.3: Y1.1 7.77,26.55 8.395,27.175 C1.1 R5.2 ; R5.2@10.525,28.575 11,29.05 11.75,29.05 12.5,29.05 cw(c12.5,28.75) 12.8,28.75 12.8,27.532 ccw(c13.1,27.532) 13.4,27.532 13.4,28.75 cw(c13.7,28.75) 13.7,29.05 U2.30
"USB XTAL 2": C2.1 R5.1 U2.29 Y1.3 | length 13.2
  Top Layer w0.3: Y1.3 5.23,31.95 6.68,30.5 8.75,30.5 9.575,31.325 C2.1 R5.1 10.537,29.888 15.724,29.888 U2.29
USB-Reset: C3.2 R6.2 U2.4 | length 5.8
  Top Layer w0.3: U2.4 19.6,24.9 21.4,23.1 C3.2 R6.2
pads on no net: U2.5 U2.6 U2.32 U3.8 X3.1

## Polygon pours and split planes (outlines as drawn)
Earth on Power Layer "Earth Power Poly" (solid, pour order 0): 50.5,0.028 54.472,0.028 54.5,0 54.5,67 0,67 0,0 3.972,0 4,0.028 4,48 50.5,48
+3V3 on Power Layer "+3V3 Poly" (solid, remove dead copper, pour order 5): 0,0 54.5,0 54.5,2.5 54.5,67 0,67
+5V on Power Layer "+5V Poly" (solid, remove dead copper, pour order 1): 37,2.5 31.5,2.5 31.5,16.25 32.54,16.25 32.54,35.45 43.25,35.45 43.25,16.25 37,16.25
GND on Bottom Layer "Top GND Poly" (hatched 45Degree grid 0.508 track 0.203, remove dead copper, pour order 3): 0,0 54.5,0 54.5,67 0,67
GND on Top Layer "Top GND Poly" (hatched 45Degree grid 0.508 track 0.203, remove dead copper, pour order 4): 0,0 54.5,0 54.5,67 0,67
GND on Ground Layer "GND Poly" (solid, remove dead copper, pour order 2): 0,0 54.5,0 54.5,67 0,67

## Keep-outs
Keep-Out Layer:
  the board outline again, w0.2

## Silkscreen, mask and mechanical layers (free items; w line width, h text height)
Top Overlay:
  drawing of 13 lines, arcs and shapes, not listed
  text "USB Hub / Breakout" at 44.085,25.25 h1
  text "V0" at 47.417,22.75 h1
  text "ON" at 46.5,17.2 h1 r90
Bottom Overlay:
  drawing of 18 lines, arcs and shapes, not listed
  text "M3" at 51,53.9 h1.2
  text "Board" at 49.75,41.05 h1.2
  text "Dim" at 49.75,39.25 h1.2
  text "67mm" at 51.25,38.826 h1.2 r270
  text "54.5mm" at 50.174,36.8 h1.2
  text "Designed / by / Russell / MacGregor" at 54.124,16.051 h1
Poly Planning:
  lines w0.2: 0,0 0,67 54.5,67 54.5,0 50.5,0 50.5,48 4,48 4,0 0,0 ; 31.5,2.5 37,2.5 37,16.25 43.25,16.25 43.25,21.76 43.25,35.45 32.54,35.45 32.54,16.25 31.5,16.25 31.5,2.5